# EAGLE board MIDICV (EAGLE 7.7.0)

Size 59.62 x 106.5 mm. Coordinates in mm from the lower left corner, seen from the top.
Copper layers (1*16): Top 0.035mm / dielectric 1.5mm / Bottom 0.035mm
Design rules "ITEADstudio_DRC": minimum track width 6mil, minimum drill 12mil, track to track 6mil, track to pad 6mil, pad to pad 6mil, via to via 6mil, smd to smd 0mil, copper to edge 10mil, drill to drill 10mil, minimum pad ring 10mil, minimum via ring 6mil, stop-mask expansion 2mil, vias tented up to drill 100mil, thermal gap 10mil
Net classes: 0 default: width 0.203 mm, clearance 0.178 mm; 1 heavypower: width 0.381 mm; 2 mediumpower: width 0.254 mm; 3 groundplane: width 0.178 mm, clearance 0.178 mm

## Footprints (pad centres in the part's own frame; a part is rotated, then mirrored left to right if it is on the bottom)
C0603 = smd 0.889 x 0.889: 1 -0.762,0; 2 0.762,0
AVX-A = smd 1.27 x 1.27: + -1.27,0; - 1.27,0
DO-214AC = smd 2.5 x 1.7: 1 -2,0; 2 2,0
SOT223 = smd 1.5 x 2: 1 -2.3,-3.15; 2 0,-3.15; 3 2.3,-3.15 | smd 3.8 x 2: 4 0,3.15
2X08_SMT_HEADER = smd 1 x 3.17: 1 -8.89,-2.54; 2 -8.89,2.54; 3 -6.35,-2.54; 4 -6.35,2.54; 5 -3.81,-2.54; 6 -3.81,2.54; 7 -1.27,-2.54; 8 -1.27,2.54; 9 1.27,-2.54; 10 1.27,2.54; 11 3.81,-2.54; 12 3.81,2.54; 13 6.35,-2.54; 14 6.35,2.54; 15 8.89,-2.54; 16 8.89,2.54
USB-B-PTH-VERTICAL = drill 0.914 pad 1.676: D+ 4.826,4.394; D- 4.826,7.595; GND 7.315,4.394; VBUS 7.315,7.595 | drill 2.286: P$1 0,4.902; P$2 12.04,4.902
3MMLED = drill 0.8: + -1.27,0; - 1.27,0
SOP65P640X110-16N = smd 1.422 x 0.356: 1 -2.845,2.286; 2 -2.845,1.626; 3 -2.845,0.965; 4 -2.845,0.33; 5 -2.845,-0.33; 6 -2.845,-0.965; 7 -2.845,-1.626; 8 -2.845,-2.286; 9 2.845,-2.286; 10 2.845,-1.626; 11 2.845,-0.965; 12 2.845,-0.33; 13 2.845,0.33; 14 2.845,0.965; 15 2.845,1.626; 16 2.845,2.286
SO14 = smd 0.6 x 2.2: 1 -3.81,-2.6; 2 -2.54,-2.6; 3 -1.27,-2.6; 4 0,-2.6; 5 1.27,-2.6; 6 2.54,-2.6; 7 3.81,-2.6; 8 3.81,2.6; 9 2.54,2.6; 10 1.27,2.6; 11 0,2.6; 12 -1.27,2.6; 13 -2.54,2.6; 14 -3.81,2.6
SOT23-BEC = smd 1 x 1.4: B -0.95,-1.1; C 0,1.1; E 0.95,-1.1
R0603 = smd 0.889 x 0.889: 1 -0.762,0; 2 0.762,0
3.5MM-JACK-SWITCH-13MM-OUTPUT = drill 0.8 pad 1.93 long: RING@3 -3.7,0; SECOND@3 0,-3.5; SWITCH@3 3.7,0; TIP@3 0,4.5
M50-3600542 = smd 0.75 x 2.5: 1 -2.54,-1.81; 2 -2.54,2; 3 -1.27,-1.81; 4 -1.27,2; 5 0,-1.81; 6 0,2; 7 1.27,-1.81; 8 1.27,2; 9 2.54,-1.81; 10 2.54,2
SOT95P237X112-3N = smd 1.321 x 0.559: 1 -1.016,0.94; 2 -1.016,-0.94; 3 1.016,0
QFN-32 = smd 1 x 0.3: 1 -2.625,1.75; 2 -2.625,1.25; 3 -2.625,0.75; 4 -2.625,0.25; 5 -2.625,-0.25; 6 -2.625,-0.75; 7 -2.625,-1.25; 8 -2.625,-1.75; 17 2.625,-1.75; 18 2.625,-1.25; 19 2.625,-0.75; 20 2.625,-0.25; 21 2.625,0.25; 22 2.625,0.75; 23 2.625,1.25; 24 2.625,1.75 | smd 0.3 x 1: 9 -1.75,-2.625; 10 -1.25,-2.625; 11 -0.75,-2.625; 12 -0.25,-2.625; 13 0.25,-2.625; 14 0.75,-2.625; 15 1.25,-2.625; 16 1.75,-2.625; 25 1.75,2.625; 26 1.25,2.625; 27 0.75,2.625; 28 0.25,2.625; 29 -0.25,2.625; 30 -0.75,2.625; 31 -1.25,2.625; 32 -1.75,2.625 | smd 3.5 x 3.5: GROUNDPAD 0,0
2P-SMD-5.0X3.2 = smd 1.778 x 2.032: 1 -2.159,0; 2 2.159,0

## Placement (x,y rotation side)
C1  [C0603]  101.4,28.26 0 top  (outside the outline)
C2  [C0603]  105.4,0.76 90 top  (outside the outline)
C3  [C0603]  110.9,0.26 0 top  (outside the outline)
C4  [C0603]  98.9,5.76 180 top  (outside the outline)
C6  [C0603]  92.57,2.33 90 top  (outside the outline)
C7  [C0603]  92.57,-0.77 90 top  (outside the outline)
C8  [C0603]  108.4,9.26 0 top  (outside the outline)
C9  100nF  [C0603]  -61.46,35.56 0 top  (outside the outline)
C10  10uF  [AVX-A]  -53.84,50.8 0 top  (outside the outline)
C11  100nF  [C0603]  -56.38,35.56 0 top  (outside the outline)
C12  10uF  [AVX-A]  -79.24,40.64 0 top  (outside the outline)
C13  10uF  [AVX-A]  -71.62,40.64 0 top  (outside the outline)
C14  100nF  [C0603]  -79.24,30.48 0 top  (outside the outline)
D1  MRA4004T3G  [DO-214AC]  -61.46,40.64 0 top  (outside the outline)
D2  MRA4004T3G  [DO-214AC]  -76.7,35.56 0 top  (outside the outline)
IC1  LD1117AS33TR  [SOT223]  -76.7,60.96 0 top  (outside the outline)
J14  POWERSMT  [2X08_SMT_HEADER]  -71.62,73.66 0 bottom  (outside the outline)
JP1  USBPTH-VERTICAL  [USB-B-PTH-VERTICAL]  17.28,15.24 180 top
OUTPUTCHANNEL1:C1  [C0603]  -58.92,119.38 0 top  (outside the outline)
OUTPUTCHANNEL1:C2  [C0603]  -69.08,99.06 0 top  (outside the outline)
OUTPUTCHANNEL1:C3  [C0603]  190,2.54 0 top  (outside the outline)
OUTPUTCHANNEL1:C4  [C0603]  136.66,-2.54 0 top  (outside the outline)
OUTPUTCHANNEL1:D40  yellow  [3MMLED]  70.62,38.1 0 top  (outside the outline)
OUTPUTCHANNEL1:IC1  DAC8564  [SOP65P640X110-16N]  -91.94,139.7 0 top  (outside the outline)
OUTPUTCHANNEL1:IC2  TL074D  [SO14]  -43.68,106.68 0 top  (outside the outline)
OUTPUTCHANNEL1:IC3  TL074D  [SO14]  176.54,92.71 0 top  (outside the outline)
OUTPUTCHANNEL1:Q3  MMBT3904  [SOT23-BEC]  -3.04,198.12 0 top  (outside the outline)
OUTPUTCHANNEL1:R1  100k  [R0603]  131.58,279.4 0 top  (outside the outline)
OUTPUTCHANNEL1:R2  100k  [R0603]  131.58,259.08 0 top  (outside the outline)
OUTPUTCHANNEL1:R3  100k  [R0603]  131.58,238.76 0 top  (outside the outline)
OUTPUTCHANNEL1:R4  100k  [R0603]  131.58,218.44 0 top  (outside the outline)
OUTPUTCHANNEL1:R5  100k  [R0603]  131.58,198.12 0 top  (outside the outline)
OUTPUTCHANNEL1:R6  100k  [R0603]  131.58,177.8 0 top  (outside the outline)
OUTPUTCHANNEL1:R7  100k  [R0603]  131.58,157.48 0 top  (outside the outline)
OUTPUTCHANNEL1:R8  100k  [R0603]  131.58,137.16 0 top  (outside the outline)
OUTPUTCHANNEL1:R9  100k  [R0603]  131.58,116.84 0 top  (outside the outline)
OUTPUTCHANNEL1:R10  56  [R0603]  12.2,177.8 0 top  (outside the outline)
OUTPUTCHANNEL1:R11  100k  [R0603]  131.58,96.52 0 top  (outside the outline)
OUTPUTCHANNEL1:R12  100k  [R0603]  184.92,76.2 0 top  (outside the outline)
OUTPUTCHANNEL1:R13  100k  [R0603]  165.87,85.09 0 top  (outside the outline)
OUTPUTCHANNEL1:R14  100k  [R0603]  183.65,85.09 0 top  (outside the outline)
OUTPUTCHANNEL1:R15  100k  [R0603]  201.43,85.09 0 top  (outside the outline)
OUTPUTCHANNEL1:R16  100k  [R0603]  219.21,85.09 0 top  (outside the outline)
OUTPUTCHANNEL1:R17  100k  [R0603]  165.87,80.01 0 top  (outside the outline)
OUTPUTCHANNEL1:R18  100k  [R0603]  183.65,80.01 0 top  (outside the outline)
OUTPUTCHANNEL1:R19  10k  [R0603]  -3.04,170.18 0 top  (outside the outline)
OUTPUTCHANNEL1:R20  100k  [R0603]  201.43,80.01 0 top  (outside the outline)
OUTPUTCHANNEL1:R21  100k  [R0603]  14.74,170.18 0 top  (outside the outline)
OUTPUTCHANNEL1:R22  100k  [R0603]  219.21,80.01 0 top  (outside the outline)
OUTPUTCHANNEL1:R23  100k  [R0603]  131.58,38.1 0 top  (outside the outline)
OUTPUTCHANNEL1:U$1  PJ-341  [3.5MM-JACK-SWITCH-13MM-OUTPUT]  70.62,58.42 0 top  (outside the outline)
OUTPUTCHANNEL1:U$2  PJ-341  [3.5MM-JACK-SWITCH-13MM-OUTPUT]  70.62,45.72 0 top  (outside the outline)
OUTPUTCHANNEL1:U$3  PJ-341  [3.5MM-JACK-SWITCH-13MM-OUTPUT]  70.62,71.12 0 top  (outside the outline)
OUTPUTCHANNEL1:U$4  PJ-341  [3.5MM-JACK-SWITCH-13MM-OUTPUT]  70.62,83.82 0 top  (outside the outline)
OUTPUTCHANNEL1:U$5  PJ-341  [3.5MM-JACK-SWITCH-13MM-OUTPUT]  70.62,96.52 0 top  (outside the outline)
OUTPUTCHANNEL2:C1  [C0603]  -61.46,114.3 0 top  (outside the outline)
OUTPUTCHANNEL2:C2  [C0603]  -71.62,93.98 0 top  (outside the outline)
OUTPUTCHANNEL2:C3  [C0603]  151.9,-2.54 0 top  (outside the outline)
OUTPUTCHANNEL2:C4  [C0603]  167.14,-2.54 0 top  (outside the outline)
OUTPUTCHANNEL2:D40  yellow  [3MMLED]  83.32,38.1 0 top  (outside the outline)
OUTPUTCHANNEL2:IC1  DAC8564  [SOP65P640X110-16N]  -94.48,175.26 0 top  (outside the outline)
OUTPUTCHANNEL2:IC2  TL074D  [SO14]  -53.84,154.94 0 top  (outside the outline)
OUTPUTCHANNEL2:IC3  TL074D  [SO14]  149.36,58.42 0 top  (outside the outline)
OUTPUTCHANNEL2:Q3  MMBT3904  [SOT23-BEC]  19.82,198.12 0 top  (outside the outline)
OUTPUTCHANNEL2:R1  100k  [R0603]  131.58,274.32 0 top  (outside the outline)
OUTPUTCHANNEL2:R2  100k  [R0603]  131.58,254 0 top  (outside the outline)
OUTPUTCHANNEL2:R3  100k  [R0603]  131.58,233.68 0 top  (outside the outline)
OUTPUTCHANNEL2:R4  100k  [R0603]  131.58,213.36 0 top  (outside the outline)
OUTPUTCHANNEL2:R5  100k  [R0603]  131.58,193.04 0 top  (outside the outline)
OUTPUTCHANNEL2:R6  100k  [R0603]  131.58,172.72 0 top  (outside the outline)
OUTPUTCHANNEL2:R7  100k  [R0603]  131.58,152.4 0 top  (outside the outline)
OUTPUTCHANNEL2:R8  100k  [R0603]  131.58,132.08 0 top  (outside the outline)
OUTPUTCHANNEL2:R9  100k  [R0603]  131.58,111.76 0 top  (outside the outline)
OUTPUTCHANNEL2:R10  56  [R0603]  -3.04,165.1 0 top  (outside the outline)
OUTPUTCHANNEL2:R11  100k  [R0603]  131.58,91.44 0 top  (outside the outline)
OUTPUTCHANNEL2:R12  100k  [R0603]  149.36,38.1 0 top  (outside the outline)
OUTPUTCHANNEL2:R13  100k  [R0603]  167.14,38.1 0 top  (outside the outline)
OUTPUTCHANNEL2:R14  100k  [R0603]  184.92,38.1 0 top  (outside the outline)
OUTPUTCHANNEL2:R15  100k  [R0603]  131.58,33.02 0 top  (outside the outline)
OUTPUTCHANNEL2:R16  100k  [R0603]  149.36,33.02 0 top  (outside the outline)
OUTPUTCHANNEL2:R17  100k  [R0603]  167.14,33.02 0 top  (outside the outline)
OUTPUTCHANNEL2:R18  100k  [R0603]  184.92,33.02 0 top  (outside the outline)
OUTPUTCHANNEL2:R19  10k  [R0603]  14.74,165.1 0 top  (outside the outline)
OUTPUTCHANNEL2:R20  100k  [R0603]  131.58,27.94 0 top  (outside the outline)
OUTPUTCHANNEL2:R21  100k  [R0603]  -3.04,160.02 0 top  (outside the outline)
OUTPUTCHANNEL2:R22  100k  [R0603]  149.36,27.94 0 top  (outside the outline)
OUTPUTCHANNEL2:R23  100k  [R0603]  167.14,27.94 0 top  (outside the outline)
OUTPUTCHANNEL2:U$1  PJ-341  [3.5MM-JACK-SWITCH-13MM-OUTPUT]  83.32,58.42 0 top  (outside the outline)
OUTPUTCHANNEL2:U$2  PJ-341  [3.5MM-JACK-SWITCH-13MM-OUTPUT]  83.32,45.72 0 top  (outside the outline)
OUTPUTCHANNEL2:U$3  PJ-341  [3.5MM-JACK-SWITCH-13MM-OUTPUT]  83.32,71.12 0 top  (outside the outline)
OUTPUTCHANNEL2:U$4  PJ-341  [3.5MM-JACK-SWITCH-13MM-OUTPUT]  83.32,83.82 0 top  (outside the outline)
OUTPUTCHANNEL2:U$5  PJ-341  [3.5MM-JACK-SWITCH-13MM-OUTPUT]  83.32,96.52 0 top  (outside the outline)
OUTPUTCHANNEL3:C1  [C0603]  -64,109.22 0 top  (outside the outline)
OUTPUTCHANNEL3:C2  [C0603]  -74.16,88.9 0 top  (outside the outline)
OUTPUTCHANNEL3:C3  [C0603]  182.38,-2.54 0 top  (outside the outline)
OUTPUTCHANNEL3:C4  [C0603]  136.66,-7.62 0 top  (outside the outline)
OUTPUTCHANNEL3:D40  yellow  [3MMLED]  96.02,38.1 0 top  (outside the outline)
OUTPUTCHANNEL3:IC1  DAC8564  [SOP65P640X110-16N]  -94.48,154.94 0 top  (outside the outline)
OUTPUTCHANNEL3:IC2  TL074D  [SO14]  -53.84,142.24 0 top  (outside the outline)
OUTPUTCHANNEL3:IC3  TL074D  [SO14]  162.06,58.42 0 top  (outside the outline)
OUTPUTCHANNEL3:Q3  MMBT3904  [SOT23-BEC]  -3.04,190.5 0 top  (outside the outline)
OUTPUTCHANNEL3:R1  100k  [R0603]  131.58,269.24 0 top  (outside the outline)
OUTPUTCHANNEL3:R2  100k  [R0603]  131.58,248.92 0 top  (outside the outline)
OUTPUTCHANNEL3:R3  100k  [R0603]  131.58,228.6 0 top  (outside the outline)
OUTPUTCHANNEL3:R4  100k  [R0603]  131.58,208.28 0 top  (outside the outline)
OUTPUTCHANNEL3:R5  100k  [R0603]  131.58,187.96 0 top  (outside the outline)
OUTPUTCHANNEL3:R6  100k  [R0603]  131.58,167.64 0 top  (outside the outline)
OUTPUTCHANNEL3:R7  100k  [R0603]  131.58,147.32 0 top  (outside the outline)
OUTPUTCHANNEL3:R8  100k  [R0603]  131.58,127 0 top  (outside the outline)
OUTPUTCHANNEL3:R9  100k  [R0603]  131.58,106.68 0 top  (outside the outline)
OUTPUTCHANNEL3:R10  56  [R0603]  14.74,160.02 0 top  (outside the outline)
OUTPUTCHANNEL3:R11  100k  [R0603]  131.58,86.36 0 top  (outside the outline)
OUTPUTCHANNEL3:R12  100k  [R0603]  184.92,27.94 0 top  (outside the outline)
OUTPUTCHANNEL3:R13  100k  [R0603]  131.58,22.86 0 top  (outside the outline)
OUTPUTCHANNEL3:R14  100k  [R0603]  149.36,22.86 0 top  (outside the outline)
OUTPUTCHANNEL3:R15  100k  [R0603]  167.14,22.86 0 top  (outside the outline)
OUTPUTCHANNEL3:R16  100k  [R0603]  184.92,22.86 0 top  (outside the outline)
OUTPUTCHANNEL3:R17  100k  [R0603]  131.58,17.78 0 top  (outside the outline)
OUTPUTCHANNEL3:R18  100k  [R0603]  149.36,17.78 0 top  (outside the outline)
OUTPUTCHANNEL3:R19  10k  [R0603]  -3.04,154.94 0 top  (outside the outline)
OUTPUTCHANNEL3:R20  100k  [R0603]  167.14,17.78 0 top  (outside the outline)
OUTPUTCHANNEL3:R21  100k  [R0603]  14.74,154.94 0 top  (outside the outline)
OUTPUTCHANNEL3:R22  100k  [R0603]  184.92,17.78 0 top  (outside the outline)
OUTPUTCHANNEL3:R23  100k  [R0603]  131.58,12.7 0 top  (outside the outline)
OUTPUTCHANNEL3:U$1  PJ-341  [3.5MM-JACK-SWITCH-13MM-OUTPUT]  96.02,58.42 0 top  (outside the outline)
OUTPUTCHANNEL3:U$2  PJ-341  [3.5MM-JACK-SWITCH-13MM-OUTPUT]  96.02,45.72 0 top  (outside the outline)
OUTPUTCHANNEL3:U$3  PJ-341  [3.5MM-JACK-SWITCH-13MM-OUTPUT]  96.02,71.12 0 top  (outside the outline)
OUTPUTCHANNEL3:U$4  PJ-341  [3.5MM-JACK-SWITCH-13MM-OUTPUT]  96.02,83.82 0 top  (outside the outline)
OUTPUTCHANNEL3:U$5  PJ-341  [3.5MM-JACK-SWITCH-13MM-OUTPUT]  96.02,96.52 0 top  (outside the outline)
OUTPUTCHANNEL4:C1  [C0603]  -66.54,104.14 0 top  (outside the outline)
OUTPUTCHANNEL4:C2  [C0603]  -76.7,83.82 0 top  (outside the outline)
OUTPUTCHANNEL4:C3  [C0603]  151.9,-7.62 0 top  (outside the outline)
OUTPUTCHANNEL4:C4  [C0603]  167.14,-7.62 0 top  (outside the outline)
OUTPUTCHANNEL4:D40  yellow  [3MMLED]  108.72,38.1 0 top  (outside the outline)
OUTPUTCHANNEL4:IC1  DAC8564  [SOP65P640X110-16N]  -86.86,127 0 top  (outside the outline)
OUTPUTCHANNEL4:IC2  TL074D  [SO14]  -53.84,129.54 0 top  (outside the outline)
OUTPUTCHANNEL4:IC3  TL074D  [SO14]  174.76,58.42 0 top  (outside the outline)
OUTPUTCHANNEL4:Q3  MMBT3904  [SOT23-BEC]  19.82,190.5 0 top  (outside the outline)
OUTPUTCHANNEL4:R1  100k  [R0603]  131.58,264.16 0 top  (outside the outline)
OUTPUTCHANNEL4:R2  100k  [R0603]  131.58,243.84 0 top  (outside the outline)
OUTPUTCHANNEL4:R3  100k  [R0603]  131.58,223.52 0 top  (outside the outline)
OUTPUTCHANNEL4:R4  100k  [R0603]  131.58,203.2 0 top  (outside the outline)
OUTPUTCHANNEL4:R5  100k  [R0603]  131.58,182.88 0 top  (outside the outline)
OUTPUTCHANNEL4:R6  100k  [R0603]  131.58,162.56 0 top  (outside the outline)
OUTPUTCHANNEL4:R7  100k  [R0603]  131.58,142.24 0 top  (outside the outline)
OUTPUTCHANNEL4:R8  100k  [R0603]  131.58,121.92 0 top  (outside the outline)
OUTPUTCHANNEL4:R9  100k  [R0603]  131.58,101.6 0 top  (outside the outline)
OUTPUTCHANNEL4:R10  56  [R0603]  -3.04,149.86 0 top  (outside the outline)
OUTPUTCHANNEL4:R11  100k  [R0603]  131.58,81.28 0 top  (outside the outline)
OUTPUTCHANNEL4:R12  100k  [R0603]  149.36,12.7 0 top  (outside the outline)
OUTPUTCHANNEL4:R13  100k  [R0603]  167.14,12.7 0 top  (outside the outline)
OUTPUTCHANNEL4:R14  100k  [R0603]  184.92,12.7 0 top  (outside the outline)
OUTPUTCHANNEL4:R15  100k  [R0603]  131.58,7.62 0 top  (outside the outline)
OUTPUTCHANNEL4:R16  100k  [R0603]  149.36,7.62 0 top  (outside the outline)
OUTPUTCHANNEL4:R17  100k  [R0603]  167.14,7.62 0 top  (outside the outline)
OUTPUTCHANNEL4:R18  100k  [R0603]  184.92,7.62 0 top  (outside the outline)
OUTPUTCHANNEL4:R19  10k  [R0603]  14.74,149.86 0 top  (outside the outline)
OUTPUTCHANNEL4:R20  100k  [R0603]  131.58,2.54 0 top  (outside the outline)
OUTPUTCHANNEL4:R21  100k  [R0603]  -3.04,144.78 0 top  (outside the outline)
OUTPUTCHANNEL4:R22  100k  [R0603]  149.36,2.54 0 top  (outside the outline)
OUTPUTCHANNEL4:R23  100k  [R0603]  167.14,2.54 0 top  (outside the outline)
OUTPUTCHANNEL4:U$1  PJ-341  [3.5MM-JACK-SWITCH-13MM-OUTPUT]  108.72,58.42 0 top  (outside the outline)
OUTPUTCHANNEL4:U$2  PJ-341  [3.5MM-JACK-SWITCH-13MM-OUTPUT]  108.72,45.72 0 top  (outside the outline)
OUTPUTCHANNEL4:U$3  PJ-341  [3.5MM-JACK-SWITCH-13MM-OUTPUT]  108.72,71.12 0 top  (outside the outline)
OUTPUTCHANNEL4:U$4  PJ-341  [3.5MM-JACK-SWITCH-13MM-OUTPUT]  108.72,83.82 0 top  (outside the outline)
OUTPUTCHANNEL4:U$5  PJ-341  [3.5MM-JACK-SWITCH-13MM-OUTPUT]  108.72,96.52 0 top  (outside the outline)
R1  33  [R0603]  108.9,-1.74 270 top  (outside the outline)
R2  33  [R0603]  107.4,-1.74 270 top  (outside the outline)
R26  10k  [R0603]  -66.54,35.56 0 top  (outside the outline)
SWD1  CORTEX_SWD  [M50-3600542]  85.66,11.22 270 bottom  (outside the outline)
U2  LM4040DIM3-5.0  [SOT95P237X112-3N]  -76.7,48.26 0 top  (outside the outline)
U$1  KL26X32VFM4  [QFN-32]  100.9,-1.74 180 top  (outside the outline)
U$2  EURORACK_PCB12HP  [EURORACK12HPPCB]  -0.5,0 0 top
X2  CRYSTAL-0500290P1  [2P-SMD-5.0X3.2]  94.98,0.66 90 top  (outside the outline)

## Library data of the parts
C1-C4 C6-C8 OUTPUTCHANNEL1:C1-OUTPUTCHANNEL1:C4 OUTPUTCHANNEL2:C1-OUTPUTCHANNEL2:C4 OUTPUTCHANNEL3:C1-OUTPUTCHANNEL3:C4 OUTPUTCHANNEL4:C1-OUTPUTCHANNEL4:C4 R1 R2 X2 = OPL
C9 C11 = OPL; MF: MULTICOMP; MPN: MC0603F104Z160CT; OC_FARNELL: 1759017
C10 C12 C13 = OPL; MF: AVX; MPN: TAJB106K020RNJ; OC_FARNELL: 197427
C14 = OPL; MF: AVX; MPN: 06035C104KAT2A; OC_FARNELL: 1301804
D1 D2 = OPL; MF: VISHAY; MPN: US1G-E3/5AT; OC_FARNELL: 9551824
IC1 = ld-components; MF: STMICROELECTRONICS; MPN: LD1117AS33TR; OC_FARNELL: 1467776
J14 = EurorackModularParts; OC_FARNELL: unknown
JP1 = SparkFun-Connectors
OUTPUTCHANNEL1:D40 OUTPUTCHANNEL1:IC1-OUTPUTCHANNEL1:IC3 OUTPUTCHANNEL2:D40 OUTPUTCHANNEL2:IC1-OUTPUTCHANNEL2:IC3 OUTPUTCHANNEL3:D40 OUTPUTCHANNEL3:IC1-OUTPUTCHANNEL3:IC3 OUTPUTCHANNEL4:D40 OUTPUTCHANNEL4:IC1-OUTPUTCHANNEL4:IC3 U$2 = EurorackModularParts
OUTPUTCHANNEL1:Q3 OUTPUTCHANNEL2:Q3 OUTPUTCHANNEL3:Q3 OUTPUTCHANNEL4:Q3 = transistor; MF: NXP; MPN: PMBT3904,215; OC_FARNELL: 2336795
OUTPUTCHANNEL1:R1-OUTPUTCHANNEL1:R23 OUTPUTCHANNEL2:R1-OUTPUTCHANNEL2:R23 OUTPUTCHANNEL3:R1-OUTPUTCHANNEL3:R23 OUTPUTCHANNEL4:R1-OUTPUTCHANNEL4:R23 R26 = OPL; OC_FARNELL: unknown
OUTPUTCHANNEL1:U$1 OUTPUTCHANNEL2:U$1 OUTPUTCHANNEL3:U$1 OUTPUTCHANNEL4:U$1 = EurorackModularParts; DESC: CV; MPN: PJ-341
OUTPUTCHANNEL1:U$2 OUTPUTCHANNEL2:U$2 OUTPUTCHANNEL3:U$2 OUTPUTCHANNEL4:U$2 = EurorackModularParts; DESC: GATE; MPN: PJ-341
OUTPUTCHANNEL1:U$3 OUTPUTCHANNEL2:U$3 OUTPUTCHANNEL3:U$3 OUTPUTCHANNEL4:U$3 = EurorackModularParts; DESC: VELOCITY; MPN: PJ-341
OUTPUTCHANNEL1:U$4 OUTPUTCHANNEL2:U$4 OUTPUTCHANNEL3:U$4 OUTPUTCHANNEL4:U$4 = EurorackModularParts; DESC: MOD; MPN: PJ-341
OUTPUTCHANNEL1:U$5 OUTPUTCHANNEL2:U$5 OUTPUTCHANNEL3:U$5 OUTPUTCHANNEL4:U$5 = EurorackModularParts; DESC: PITCH; MPN: PJ-341
SWD1 = carrilib with jtags
U2 = FarnellThings; MF: TEXAS INSTRUMENTS; MPN: LM4040DIM3-5.0; OC_FARNELL: 9778330; OC_NEWARK: 97K3489; PACKAGE: SOT-23-3; SUPPLIER: TEXAS INSTRUMENTS
U$1 = MK26-QFN

## Nets
3.3V: C1.1 C2.1 C3.1 C4.1 C8.1 C9.2 C12.+ IC1.2 IC1.4 SWD1.1 U$1.7 U$1.15
12V [heavypower]: C11.2 C13.+ D1.2 IC1.3 OUTPUTCHANNEL1:C1.1 OUTPUTCHANNEL1:C3.1 OUTPUTCHANNEL1:IC2.4 OUTPUTCHANNEL1:IC3.4 OUTPUTCHANNEL1:R19.2 OUTPUTCHANNEL2:C1.1 OUTPUTCHANNEL2:C3.1 OUTPUTCHANNEL2:IC2.4 OUTPUTCHANNEL2:IC3.4 OUTPUTCHANNEL2:R19.2 OUTPUTCHANNEL3:C1.1 OUTPUTCHANNEL3:C3.1 OUTPUTCHANNEL3:IC2.4 OUTPUTCHANNEL3:IC3.4 OUTPUTCHANNEL3:R19.2 OUTPUTCHANNEL4:C1.1 OUTPUTCHANNEL4:C3.1 OUTPUTCHANNEL4:IC2.4 OUTPUTCHANNEL4:IC3.4 OUTPUTCHANNEL4:R19.2
-12V [heavypower]: C10.- D2.1 OUTPUTCHANNEL1:C2.1 OUTPUTCHANNEL1:C4.1 OUTPUTCHANNEL1:IC2.11 OUTPUTCHANNEL1:IC3.11 OUTPUTCHANNEL2:C2.1 OUTPUTCHANNEL2:C4.1 OUTPUTCHANNEL2:IC2.11 OUTPUTCHANNEL2:IC3.11 OUTPUTCHANNEL3:C2.1 OUTPUTCHANNEL3:C4.1 OUTPUTCHANNEL3:IC2.11 OUTPUTCHANNEL3:IC3.11 OUTPUTCHANNEL4:C2.1 OUTPUTCHANNEL4:C4.1 OUTPUTCHANNEL4:IC2.11 OUTPUTCHANNEL4:IC3.11 R26.1
BUTTON4: SWD1.10 U$1.19
EXTCV: J14.13 J14.14 OUTPUTCHANNEL1:R2.2 OUTPUTCHANNEL1:U$1.TIP@3
EXTGATE: J14.15 J14.16 OUTPUTCHANNEL1:R10.2 OUTPUTCHANNEL1:R21.1
GND: C1.2 C2.2 C3.2 C4.2 C6.1 C7.2 C8.2 C9.1 C10.+ C11.1 C12.- C13.- C14.1 IC1.1 J14.3 J14.4 J14.5 J14.6 J14.7 J14.8 JP1.GND OUTPUTCHANNEL1:C1.2 OUTPUTCHANNEL1:C2.2 OUTPUTCHANNEL1:C3.2 OUTPUTCHANNEL1:C4.2 OUTPUTCHANNEL1:IC1.6 OUTPUTCHANNEL1:IC2.3 OUTPUTCHANNEL1:IC2.5 OUTPUTCHANNEL1:IC2.10 OUTPUTCHANNEL1:IC2.12 OUTPUTCHANNEL1:IC3.3 OUTPUTCHANNEL1:IC3.5 OUTPUTCHANNEL1:IC3.10 OUTPUTCHANNEL1:IC3.12 OUTPUTCHANNEL1:Q3.E OUTPUTCHANNEL1:U$1.RING@3 OUTPUTCHANNEL1:U$2.RING@3 OUTPUTCHANNEL1:U$3.RING@3 OUTPUTCHANNEL1:U$4.RING@3 OUTPUTCHANNEL1:U$5.RING@3 OUTPUTCHANNEL2:C1.2 OUTPUTCHANNEL2:C2.2 OUTPUTCHANNEL2:C3.2 OUTPUTCHANNEL2:C4.2 OUTPUTCHANNEL2:IC1.6 OUTPUTCHANNEL2:IC2.3 OUTPUTCHANNEL2:IC2.5 OUTPUTCHANNEL2:IC2.10 OUTPUTCHANNEL2:IC2.12 OUTPUTCHANNEL2:IC3.3 OUTPUTCHANNEL2:IC3.5 OUTPUTCHANNEL2:IC3.10 OUTPUTCHANNEL2:IC3.12 OUTPUTCHANNEL2:Q3.E OUTPUTCHANNEL2:U$1.RING@3 OUTPUTCHANNEL2:U$2.RING@3 OUTPUTCHANNEL2:U$3.RING@3 OUTPUTCHANNEL2:U$4.RING@3 OUTPUTCHANNEL2:U$5.RING@3 OUTPUTCHANNEL3:C1.2 OUTPUTCHANNEL3:C2.2 OUTPUTCHANNEL3:C3.2 OUTPUTCHANNEL3:C4.2 OUTPUTCHANNEL3:IC1.6 OUTPUTCHANNEL3:IC2.3 OUTPUTCHANNEL3:IC2.5 OUTPUTCHANNEL3:IC2.10 OUTPUTCHANNEL3:IC2.12 OUTPUTCHANNEL3:IC3.3 OUTPUTCHANNEL3:IC3.5 OUTPUTCHANNEL3:IC3.10 OUTPUTCHANNEL3:IC3.12 OUTPUTCHANNEL3:Q3.E OUTPUTCHANNEL3:U$1.RING@3 OUTPUTCHANNEL3:U$2.RING@3 OUTPUTCHANNEL3:U$3.RING@3 OUTPUTCHANNEL3:U$4.RING@3 OUTPUTCHANNEL3:U$5.RING@3 OUTPUTCHANNEL4:C1.2 OUTPUTCHANNEL4:C2.2 OUTPUTCHANNEL4:C3.2 OUTPUTCHANNEL4:C4.2 OUTPUTCHANNEL4:IC1.6 OUTPUTCHANNEL4:IC2.3 OUTPUTCHANNEL4:IC2.5 OUTPUTCHANNEL4:IC2.10 OUTPUTCHANNEL4:IC2.12 OUTPUTCHANNEL4:IC3.3 OUTPUTCHANNEL4:IC3.5 OUTPUTCHANNEL4:IC3.10 OUTPUTCHANNEL4:IC3.12 OUTPUTCHANNEL4:Q3.E OUTPUTCHANNEL4:U$1.RING@3 OUTPUTCHANNEL4:U$2.RING@3 OUTPUTCHANNEL4:U$3.RING@3 OUTPUTCHANNEL4:U$4.RING@3 OUTPUTCHANNEL4:U$5.RING@3 SWD1.3 SWD1.5 SWD1.9 U2.1 U$1.2 U$1.8 U$1.16 U$1.GROUNDPAD
N$1: JP1.D- R2.1
N$2: JP1.D+ R1.1
N$3: R1.2 U$1.3
N$4: R2.2 U$1.4
N$5: OUTPUTCHANNEL2:R10.2 OUTPUTCHANNEL2:R21.1
N$6: OUTPUTCHANNEL3:R10.2 OUTPUTCHANNEL3:R21.1
N$7: OUTPUTCHANNEL4:R10.2 OUTPUTCHANNEL4:R21.1
N$11: C6.2 U$1.17 X2.2
N$12: C7.1 U$1.18 X2.1
N$13 [heavypower]: D1.1 J14.9 J14.10
N$64 [heavypower]: D2.2 J14.1 J14.2
OUTPUTCHANNEL1:3.3V [mediumpower]: OUTPUTCHANNEL1:D40.+
OUTPUTCHANNEL1:MOD: OUTPUTCHANNEL1:R13.2 OUTPUTCHANNEL1:U$4.TIP@3
OUTPUTCHANNEL1:N$1: OUTPUTCHANNEL1:IC1.15
OUTPUTCHANNEL1:N$2: OUTPUTCHANNEL1:IC1.11
OUTPUTCHANNEL1:N$3: OUTPUTCHANNEL1:IC1.10
OUTPUTCHANNEL1:N$4: OUTPUTCHANNEL1:IC1.9
OUTPUTCHANNEL1:N$5: OUTPUTCHANNEL1:IC2.6 OUTPUTCHANNEL1:R1.2 OUTPUTCHANNEL1:R9.1
OUTPUTCHANNEL1:N$6: OUTPUTCHANNEL1:IC2.13 OUTPUTCHANNEL1:R4.2 OUTPUTCHANNEL1:R8.1
OUTPUTCHANNEL1:N$8: OUTPUTCHANNEL1:IC2.14 OUTPUTCHANNEL1:R3.1 OUTPUTCHANNEL1:R8.2
OUTPUTCHANNEL1:N$9: OUTPUTCHANNEL1:IC2.7 OUTPUTCHANNEL1:R2.1 OUTPUTCHANNEL1:R9.2
OUTPUTCHANNEL1:N$11: OUTPUTCHANNEL1:IC2.1 OUTPUTCHANNEL1:R1.1 OUTPUTCHANNEL1:R11.2
OUTPUTCHANNEL1:N$12: OUTPUTCHANNEL1:IC2.8 OUTPUTCHANNEL1:R4.1 OUTPUTCHANNEL1:R7.2
OUTPUTCHANNEL1:N$13: OUTPUTCHANNEL1:IC2.2 OUTPUTCHANNEL1:R5.2 OUTPUTCHANNEL1:R11.1
OUTPUTCHANNEL1:N$14: OUTPUTCHANNEL1:IC2.9 OUTPUTCHANNEL1:R6.2 OUTPUTCHANNEL1:R7.1
OUTPUTCHANNEL1:N$15: OUTPUTCHANNEL1:IC1.2 OUTPUTCHANNEL1:R6.1
OUTPUTCHANNEL1:N$16: OUTPUTCHANNEL1:IC1.1 OUTPUTCHANNEL1:R5.1
OUTPUTCHANNEL1:N$17: OUTPUTCHANNEL1:IC3.6 OUTPUTCHANNEL1:R12.2 OUTPUTCHANNEL1:R22.1
OUTPUTCHANNEL1:N$18: OUTPUTCHANNEL1:IC3.13 OUTPUTCHANNEL1:R15.2 OUTPUTCHANNEL1:R20.1
OUTPUTCHANNEL1:N$20: OUTPUTCHANNEL1:IC3.14 OUTPUTCHANNEL1:R14.1 OUTPUTCHANNEL1:R20.2
OUTPUTCHANNEL1:N$21: OUTPUTCHANNEL1:IC3.7 OUTPUTCHANNEL1:R13.1 OUTPUTCHANNEL1:R22.2
OUTPUTCHANNEL1:N$23: OUTPUTCHANNEL1:D40.- OUTPUTCHANNEL1:R10.1
OUTPUTCHANNEL1:N$24: OUTPUTCHANNEL1:IC3.1 OUTPUTCHANNEL1:R12.1 OUTPUTCHANNEL1:R23.2
OUTPUTCHANNEL1:N$25: OUTPUTCHANNEL1:Q3.B OUTPUTCHANNEL1:R21.2
OUTPUTCHANNEL1:N$26: OUTPUTCHANNEL1:IC3.8 OUTPUTCHANNEL1:R15.1 OUTPUTCHANNEL1:R18.2
OUTPUTCHANNEL1:N$27: OUTPUTCHANNEL1:IC3.2 OUTPUTCHANNEL1:R16.2 OUTPUTCHANNEL1:R23.1
OUTPUTCHANNEL1:N$28: OUTPUTCHANNEL1:IC3.9 OUTPUTCHANNEL1:R17.2 OUTPUTCHANNEL1:R18.1
OUTPUTCHANNEL1:N$29: OUTPUTCHANNEL1:Q3.C OUTPUTCHANNEL1:R19.1 OUTPUTCHANNEL1:U$2.TIP@3
OUTPUTCHANNEL1:N$30: OUTPUTCHANNEL1:IC1.8 OUTPUTCHANNEL1:R17.1
OUTPUTCHANNEL1:N$31: OUTPUTCHANNEL1:IC1.7 OUTPUTCHANNEL1:R16.1
OUTPUTCHANNEL1:N$35: OUTPUTCHANNEL1:IC1.13
OUTPUTCHANNEL1:N$36: OUTPUTCHANNEL1:IC1.14
OUTPUTCHANNEL1:N$37: OUTPUTCHANNEL1:IC1.16
OUTPUTCHANNEL1:N$38: OUTPUTCHANNEL1:IC1.12
OUTPUTCHANNEL1:N$39: OUTPUTCHANNEL1:IC1.3
OUTPUTCHANNEL1:N$40: OUTPUTCHANNEL1:IC1.5
OUTPUTCHANNEL1:N$41: OUTPUTCHANNEL1:IC1.4
OUTPUTCHANNEL1:PITCH: OUTPUTCHANNEL1:R14.2 OUTPUTCHANNEL1:U$5.TIP@3
OUTPUTCHANNEL1:VELOCITY: OUTPUTCHANNEL1:R3.2 OUTPUTCHANNEL1:U$3.TIP@3
OUTPUTCHANNEL2:3.3V [mediumpower]: OUTPUTCHANNEL2:D40.+
OUTPUTCHANNEL2:CV_OUT: OUTPUTCHANNEL2:R2.2 OUTPUTCHANNEL2:U$1.TIP@3
OUTPUTCHANNEL2:MOD: OUTPUTCHANNEL2:R13.2 OUTPUTCHANNEL2:U$4.TIP@3
OUTPUTCHANNEL2:N$1: OUTPUTCHANNEL2:IC1.15
OUTPUTCHANNEL2:N$2: OUTPUTCHANNEL2:IC1.11
OUTPUTCHANNEL2:N$3: OUTPUTCHANNEL2:IC1.10
OUTPUTCHANNEL2:N$4: OUTPUTCHANNEL2:IC1.9
OUTPUTCHANNEL2:N$5: OUTPUTCHANNEL2:IC2.6 OUTPUTCHANNEL2:R1.2 OUTPUTCHANNEL2:R9.1
OUTPUTCHANNEL2:N$6: OUTPUTCHANNEL2:IC2.13 OUTPUTCHANNEL2:R4.2 OUTPUTCHANNEL2:R8.1
OUTPUTCHANNEL2:N$8: OUTPUTCHANNEL2:IC2.14 OUTPUTCHANNEL2:R3.1 OUTPUTCHANNEL2:R8.2
OUTPUTCHANNEL2:N$9: OUTPUTCHANNEL2:IC2.7 OUTPUTCHANNEL2:R2.1 OUTPUTCHANNEL2:R9.2
OUTPUTCHANNEL2:N$11: OUTPUTCHANNEL2:IC2.1 OUTPUTCHANNEL2:R1.1 OUTPUTCHANNEL2:R11.2
OUTPUTCHANNEL2:N$12: OUTPUTCHANNEL2:IC2.8 OUTPUTCHANNEL2:R4.1 OUTPUTCHANNEL2:R7.2
OUTPUTCHANNEL2:N$13: OUTPUTCHANNEL2:IC2.2 OUTPUTCHANNEL2:R5.2 OUTPUTCHANNEL2:R11.1
OUTPUTCHANNEL2:N$14: OUTPUTCHANNEL2:IC2.9 OUTPUTCHANNEL2:R6.2 OUTPUTCHANNEL2:R7.1
OUTPUTCHANNEL2:N$15: OUTPUTCHANNEL2:IC1.2 OUTPUTCHANNEL2:R6.1
OUTPUTCHANNEL2:N$16: OUTPUTCHANNEL2:IC1.1 OUTPUTCHANNEL2:R5.1
OUTPUTCHANNEL2:N$17: OUTPUTCHANNEL2:IC3.6 OUTPUTCHANNEL2:R12.2 OUTPUTCHANNEL2:R22.1
OUTPUTCHANNEL2:N$18: OUTPUTCHANNEL2:IC3.13 OUTPUTCHANNEL2:R15.2 OUTPUTCHANNEL2:R20.1
OUTPUTCHANNEL2:N$20: OUTPUTCHANNEL2:IC3.14 OUTPUTCHANNEL2:R14.1 OUTPUTCHANNEL2:R20.2
OUTPUTCHANNEL2:N$21: OUTPUTCHANNEL2:IC3.7 OUTPUTCHANNEL2:R13.1 OUTPUTCHANNEL2:R22.2
OUTPUTCHANNEL2:N$23: OUTPUTCHANNEL2:D40.- OUTPUTCHANNEL2:R10.1
OUTPUTCHANNEL2:N$24: OUTPUTCHANNEL2:IC3.1 OUTPUTCHANNEL2:R12.1 OUTPUTCHANNEL2:R23.2
OUTPUTCHANNEL2:N$25: OUTPUTCHANNEL2:Q3.B OUTPUTCHANNEL2:R21.2
OUTPUTCHANNEL2:N$26: OUTPUTCHANNEL2:IC3.8 OUTPUTCHANNEL2:R15.1 OUTPUTCHANNEL2:R18.2
OUTPUTCHANNEL2:N$27: OUTPUTCHANNEL2:IC3.2 OUTPUTCHANNEL2:R16.2 OUTPUTCHANNEL2:R23.1
OUTPUTCHANNEL2:N$28: OUTPUTCHANNEL2:IC3.9 OUTPUTCHANNEL2:R17.2 OUTPUTCHANNEL2:R18.1
OUTPUTCHANNEL2:N$29: OUTPUTCHANNEL2:Q3.C OUTPUTCHANNEL2:R19.1 OUTPUTCHANNEL2:U$2.TIP@3
OUTPUTCHANNEL2:N$30: OUTPUTCHANNEL2:IC1.8 OUTPUTCHANNEL2:R17.1
OUTPUTCHANNEL2:N$31: OUTPUTCHANNEL2:IC1.7 OUTPUTCHANNEL2:R16.1
OUTPUTCHANNEL2:N$35: OUTPUTCHANNEL2:IC1.13
OUTPUTCHANNEL2:N$36: OUTPUTCHANNEL2:IC1.14
OUTPUTCHANNEL2:N$37: OUTPUTCHANNEL2:IC1.16
OUTPUTCHANNEL2:N$38: OUTPUTCHANNEL2:IC1.12
OUTPUTCHANNEL2:N$39: OUTPUTCHANNEL2:IC1.3
OUTPUTCHANNEL2:N$40: OUTPUTCHANNEL2:IC1.5
OUTPUTCHANNEL2:N$41: OUTPUTCHANNEL2:IC1.4
OUTPUTCHANNEL2:PITCH: OUTPUTCHANNEL2:R14.2 OUTPUTCHANNEL2:U$5.TIP@3
OUTPUTCHANNEL2:VELOCITY: OUTPUTCHANNEL2:R3.2 OUTPUTCHANNEL2:U$3.TIP@3
OUTPUTCHANNEL3:3.3V [mediumpower]: OUTPUTCHANNEL3:D40.+
OUTPUTCHANNEL3:CV_OUT: OUTPUTCHANNEL3:R2.2 OUTPUTCHANNEL3:U$1.TIP@3
OUTPUTCHANNEL3:MOD: OUTPUTCHANNEL3:R13.2 OUTPUTCHANNEL3:U$4.TIP@3
OUTPUTCHANNEL3:N$1: OUTPUTCHANNEL3:IC1.15
OUTPUTCHANNEL3:N$2: OUTPUTCHANNEL3:IC1.11
OUTPUTCHANNEL3:N$3: OUTPUTCHANNEL3:IC1.10
OUTPUTCHANNEL3:N$4: OUTPUTCHANNEL3:IC1.9
OUTPUTCHANNEL3:N$5: OUTPUTCHANNEL3:IC2.6 OUTPUTCHANNEL3:R1.2 OUTPUTCHANNEL3:R9.1
OUTPUTCHANNEL3:N$6: OUTPUTCHANNEL3:IC2.13 OUTPUTCHANNEL3:R4.2 OUTPUTCHANNEL3:R8.1
OUTPUTCHANNEL3:N$8: OUTPUTCHANNEL3:IC2.14 OUTPUTCHANNEL3:R3.1 OUTPUTCHANNEL3:R8.2
OUTPUTCHANNEL3:N$9: OUTPUTCHANNEL3:IC2.7 OUTPUTCHANNEL3:R2.1 OUTPUTCHANNEL3:R9.2
OUTPUTCHANNEL3:N$11: OUTPUTCHANNEL3:IC2.1 OUTPUTCHANNEL3:R1.1 OUTPUTCHANNEL3:R11.2
OUTPUTCHANNEL3:N$12: OUTPUTCHANNEL3:IC2.8 OUTPUTCHANNEL3:R4.1 OUTPUTCHANNEL3:R7.2
OUTPUTCHANNEL3:N$13: OUTPUTCHANNEL3:IC2.2 OUTPUTCHANNEL3:R5.2 OUTPUTCHANNEL3:R11.1
OUTPUTCHANNEL3:N$14: OUTPUTCHANNEL3:IC2.9 OUTPUTCHANNEL3:R6.2 OUTPUTCHANNEL3:R7.1
OUTPUTCHANNEL3:N$15: OUTPUTCHANNEL3:IC1.2 OUTPUTCHANNEL3:R6.1
OUTPUTCHANNEL3:N$16: OUTPUTCHANNEL3:IC1.1 OUTPUTCHANNEL3:R5.1
OUTPUTCHANNEL3:N$17: OUTPUTCHANNEL3:IC3.6 OUTPUTCHANNEL3:R12.2 OUTPUTCHANNEL3:R22.1
OUTPUTCHANNEL3:N$18: OUTPUTCHANNEL3:IC3.13 OUTPUTCHANNEL3:R15.2 OUTPUTCHANNEL3:R20.1
OUTPUTCHANNEL3:N$20: OUTPUTCHANNEL3:IC3.14 OUTPUTCHANNEL3:R14.1 OUTPUTCHANNEL3:R20.2
OUTPUTCHANNEL3:N$21: OUTPUTCHANNEL3:IC3.7 OUTPUTCHANNEL3:R13.1 OUTPUTCHANNEL3:R22.2
OUTPUTCHANNEL3:N$23: OUTPUTCHANNEL3:D40.- OUTPUTCHANNEL3:R10.1
OUTPUTCHANNEL3:N$24: OUTPUTCHANNEL3:IC3.1 OUTPUTCHANNEL3:R12.1 OUTPUTCHANNEL3:R23.2
OUTPUTCHANNEL3:N$25: OUTPUTCHANNEL3:Q3.B OUTPUTCHANNEL3:R21.2
OUTPUTCHANNEL3:N$26: OUTPUTCHANNEL3:IC3.8 OUTPUTCHANNEL3:R15.1 OUTPUTCHANNEL3:R18.2
OUTPUTCHANNEL3:N$27: OUTPUTCHANNEL3:IC3.2 OUTPUTCHANNEL3:R16.2 OUTPUTCHANNEL3:R23.1
OUTPUTCHANNEL3:N$28: OUTPUTCHANNEL3:IC3.9 OUTPUTCHANNEL3:R17.2 OUTPUTCHANNEL3:R18.1
OUTPUTCHANNEL3:N$29: OUTPUTCHANNEL3:Q3.C OUTPUTCHANNEL3:R19.1 OUTPUTCHANNEL3:U$2.TIP@3
OUTPUTCHANNEL3:N$30: OUTPUTCHANNEL3:IC1.8 OUTPUTCHANNEL3:R17.1
OUTPUTCHANNEL3:N$31: OUTPUTCHANNEL3:IC1.7 OUTPUTCHANNEL3:R16.1
OUTPUTCHANNEL3:N$35: OUTPUTCHANNEL3:IC1.13
OUTPUTCHANNEL3:N$36: OUTPUTCHANNEL3:IC1.14
OUTPUTCHANNEL3:N$37: OUTPUTCHANNEL3:IC1.16
OUTPUTCHANNEL3:N$38: OUTPUTCHANNEL3:IC1.12
OUTPUTCHANNEL3:N$39: OUTPUTCHANNEL3:IC1.3
OUTPUTCHANNEL3:N$40: OUTPUTCHANNEL3:IC1.5
OUTPUTCHANNEL3:N$41: OUTPUTCHANNEL3:IC1.4
OUTPUTCHANNEL3:PITCH: OUTPUTCHANNEL3:R14.2 OUTPUTCHANNEL3:U$5.TIP@3
OUTPUTCHANNEL3:VELOCITY: OUTPUTCHANNEL3:R3.2 OUTPUTCHANNEL3:U$3.TIP@3
OUTPUTCHANNEL4:3.3V [mediumpower]: OUTPUTCHANNEL4:D40.+
OUTPUTCHANNEL4:CV_OUT: OUTPUTCHANNEL4:R2.2 OUTPUTCHANNEL4:U$1.TIP@3
OUTPUTCHANNEL4:MOD: OUTPUTCHANNEL4:R13.2 OUTPUTCHANNEL4:U$4.TIP@3
OUTPUTCHANNEL4:N$1: OUTPUTCHANNEL4:IC1.15
OUTPUTCHANNEL4:N$2: OUTPUTCHANNEL4:IC1.11
OUTPUTCHANNEL4:N$3: OUTPUTCHANNEL4:IC1.10
OUTPUTCHANNEL4:N$4: OUTPUTCHANNEL4:IC1.9
OUTPUTCHANNEL4:N$5: OUTPUTCHANNEL4:IC2.6 OUTPUTCHANNEL4:R1.2 OUTPUTCHANNEL4:R9.1
OUTPUTCHANNEL4:N$6: OUTPUTCHANNEL4:IC2.13 OUTPUTCHANNEL4:R4.2 OUTPUTCHANNEL4:R8.1
OUTPUTCHANNEL4:N$8: OUTPUTCHANNEL4:IC2.14 OUTPUTCHANNEL4:R3.1 OUTPUTCHANNEL4:R8.2
OUTPUTCHANNEL4:N$9: OUTPUTCHANNEL4:IC2.7 OUTPUTCHANNEL4:R2.1 OUTPUTCHANNEL4:R9.2
OUTPUTCHANNEL4:N$11: OUTPUTCHANNEL4:IC2.1 OUTPUTCHANNEL4:R1.1 OUTPUTCHANNEL4:R11.2
OUTPUTCHANNEL4:N$12: OUTPUTCHANNEL4:IC2.8 OUTPUTCHANNEL4:R4.1 OUTPUTCHANNEL4:R7.2
OUTPUTCHANNEL4:N$13: OUTPUTCHANNEL4:IC2.2 OUTPUTCHANNEL4:R5.2 OUTPUTCHANNEL4:R11.1
OUTPUTCHANNEL4:N$14: OUTPUTCHANNEL4:IC2.9 OUTPUTCHANNEL4:R6.2 OUTPUTCHANNEL4:R7.1
OUTPUTCHANNEL4:N$15: OUTPUTCHANNEL4:IC1.2 OUTPUTCHANNEL4:R6.1
OUTPUTCHANNEL4:N$16: OUTPUTCHANNEL4:IC1.1 OUTPUTCHANNEL4:R5.1
OUTPUTCHANNEL4:N$17: OUTPUTCHANNEL4:IC3.6 OUTPUTCHANNEL4:R12.2 OUTPUTCHANNEL4:R22.1
OUTPUTCHANNEL4:N$18: OUTPUTCHANNEL4:IC3.13 OUTPUTCHANNEL4:R15.2 OUTPUTCHANNEL4:R20.1
OUTPUTCHANNEL4:N$20: OUTPUTCHANNEL4:IC3.14 OUTPUTCHANNEL4:R14.1 OUTPUTCHANNEL4:R20.2
OUTPUTCHANNEL4:N$21: OUTPUTCHANNEL4:IC3.7 OUTPUTCHANNEL4:R13.1 OUTPUTCHANNEL4:R22.2
OUTPUTCHANNEL4:N$23: OUTPUTCHANNEL4:D40.- OUTPUTCHANNEL4:R10.1
OUTPUTCHANNEL4:N$24: OUTPUTCHANNEL4:IC3.1 OUTPUTCHANNEL4:R12.1 OUTPUTCHANNEL4:R23.2
OUTPUTCHANNEL4:N$25: OUTPUTCHANNEL4:Q3.B OUTPUTCHANNEL4:R21.2
OUTPUTCHANNEL4:N$26: OUTPUTCHANNEL4:IC3.8 OUTPUTCHANNEL4:R15.1 OUTPUTCHANNEL4:R18.2
OUTPUTCHANNEL4:N$27: OUTPUTCHANNEL4:IC3.2 OUTPUTCHANNEL4:R16.2 OUTPUTCHANNEL4:R23.1
OUTPUTCHANNEL4:N$28: OUTPUTCHANNEL4:IC3.9 OUTPUTCHANNEL4:R17.2 OUTPUTCHANNEL4:R18.1
OUTPUTCHANNEL4:N$29: OUTPUTCHANNEL4:Q3.C OUTPUTCHANNEL4:R19.1 OUTPUTCHANNEL4:U$2.TIP@3
OUTPUTCHANNEL4:N$30: OUTPUTCHANNEL4:IC1.8 OUTPUTCHANNEL4:R17.1
OUTPUTCHANNEL4:N$31: OUTPUTCHANNEL4:IC1.7 OUTPUTCHANNEL4:R16.1
OUTPUTCHANNEL4:N$35: OUTPUTCHANNEL4:IC1.13
OUTPUTCHANNEL4:N$36: OUTPUTCHANNEL4:IC1.14
OUTPUTCHANNEL4:N$37: OUTPUTCHANNEL4:IC1.16
OUTPUTCHANNEL4:N$38: OUTPUTCHANNEL4:IC1.12
OUTPUTCHANNEL4:N$39: OUTPUTCHANNEL4:IC1.3
OUTPUTCHANNEL4:N$40: OUTPUTCHANNEL4:IC1.5
OUTPUTCHANNEL4:N$41: OUTPUTCHANNEL4:IC1.4
OUTPUTCHANNEL4:PITCH: OUTPUTCHANNEL4:R14.2 OUTPUTCHANNEL4:U$5.TIP@3
OUTPUTCHANNEL4:VELOCITY: OUTPUTCHANNEL4:R3.2 OUTPUTCHANNEL4:U$3.TIP@3
REF_-5V: C14.2 R26.2 U2.2
SWDCLK: SWD1.4 U$1.10
SWDIO: SWD1.2 U$1.13
VBUS: JP1.VBUS

## Tracks (layer width: path | path; a pad name or v marks a point on that pad's centre or on a via)
3.3V  (11 unrouted)
12V  (23 unrouted)
-12V  (18 unrouted)
BUTTON4  (1 unrouted)
EXTCV  (3 unrouted)
EXTGATE  (3 unrouted)
GND  (104 unrouted)
N$1  (1 unrouted)
N$2  (1 unrouted)
N$3  (1 unrouted)
N$4  (1 unrouted)
N$5  (1 unrouted)
N$6  (1 unrouted)
N$7  (1 unrouted)
N$11  (2 unrouted)
N$12  (2 unrouted)
N$13  (2 unrouted)
N$64  (2 unrouted)
OUTPUTCHANNEL1:MOD  (1 unrouted)
OUTPUTCHANNEL1:N$5  (2 unrouted)
OUTPUTCHANNEL1:N$6  (2 unrouted)
OUTPUTCHANNEL1:N$8  (2 unrouted)
OUTPUTCHANNEL1:N$9  (2 unrouted)
OUTPUTCHANNEL1:N$11  (2 unrouted)
OUTPUTCHANNEL1:N$12  (2 unrouted)
OUTPUTCHANNEL1:N$13  (2 unrouted)
OUTPUTCHANNEL1:N$14  (2 unrouted)
OUTPUTCHANNEL1:N$15  (1 unrouted)
OUTPUTCHANNEL1:N$16  (1 unrouted)
OUTPUTCHANNEL1:N$17  (2 unrouted)
OUTPUTCHANNEL1:N$18  (2 unrouted)
OUTPUTCHANNEL1:N$20  (2 unrouted)
OUTPUTCHANNEL1:N$21  (2 unrouted)
OUTPUTCHANNEL1:N$23  (1 unrouted)
OUTPUTCHANNEL1:N$24  (2 unrouted)
OUTPUTCHANNEL1:N$25  (1 unrouted)
OUTPUTCHANNEL1:N$26  (2 unrouted)
OUTPUTCHANNEL1:N$27  (2 unrouted)
OUTPUTCHANNEL1:N$28  (2 unrouted)
OUTPUTCHANNEL1:N$29  (2 unrouted)
OUTPUTCHANNEL1:N$30  (1 unrouted)
OUTPUTCHANNEL1:N$31  (1 unrouted)
OUTPUTCHANNEL1:PITCH  (1 unrouted)
OUTPUTCHANNEL1:VELOCITY  (1 unrouted)
OUTPUTCHANNEL2:CV_OUT  (1 unrouted)
OUTPUTCHANNEL2:MOD  (1 unrouted)
OUTPUTCHANNEL2:N$5  (2 unrouted)
OUTPUTCHANNEL2:N$6  (2 unrouted)
OUTPUTCHANNEL2:N$8  (2 unrouted)
OUTPUTCHANNEL2:N$9  (2 unrouted)
OUTPUTCHANNEL2:N$11  (2 unrouted)
OUTPUTCHANNEL2:N$12  (2 unrouted)
OUTPUTCHANNEL2:N$13  (2 unrouted)
OUTPUTCHANNEL2:N$14  (2 unrouted)
OUTPUTCHANNEL2:N$15  (1 unrouted)
OUTPUTCHANNEL2:N$16  (1 unrouted)
OUTPUTCHANNEL2:N$17  (2 unrouted)
OUTPUTCHANNEL2:N$18  (2 unrouted)
OUTPUTCHANNEL2:N$20  (2 unrouted)
OUTPUTCHANNEL2:N$21  (2 unrouted)
OUTPUTCHANNEL2:N$23  (1 unrouted)
OUTPUTCHANNEL2:N$24  (2 unrouted)
OUTPUTCHANNEL2:N$25  (1 unrouted)
OUTPUTCHANNEL2:N$26  (2 unrouted)
OUTPUTCHANNEL2:N$27  (2 unrouted)
OUTPUTCHANNEL2:N$28  (2 unrouted)
OUTPUTCHANNEL2:N$29  (2 unrouted)
OUTPUTCHANNEL2:N$30  (1 unrouted)
OUTPUTCHANNEL2:N$31  (1 unrouted)
OUTPUTCHANNEL2:PITCH  (1 unrouted)
OUTPUTCHANNEL2:VELOCITY  (1 unrouted)
OUTPUTCHANNEL3:CV_OUT  (1 unrouted)
OUTPUTCHANNEL3:MOD  (1 unrouted)
OUTPUTCHANNEL3:N$5  (2 unrouted)
OUTPUTCHANNEL3:N$6  (2 unrouted)
OUTPUTCHANNEL3:N$8  (2 unrouted)
OUTPUTCHANNEL3:N$9  (2 unrouted)
OUTPUTCHANNEL3:N$11  (2 unrouted)
OUTPUTCHANNEL3:N$12  (2 unrouted)
OUTPUTCHANNEL3:N$13  (2 unrouted)
OUTPUTCHANNEL3:N$14  (2 unrouted)
OUTPUTCHANNEL3:N$15  (1 unrouted)
OUTPUTCHANNEL3:N$16  (1 unrouted)
OUTPUTCHANNEL3:N$17  (2 unrouted)
OUTPUTCHANNEL3:N$18  (2 unrouted)
OUTPUTCHANNEL3:N$20  (2 unrouted)
OUTPUTCHANNEL3:N$21  (2 unrouted)
OUTPUTCHANNEL3:N$23  (1 unrouted)
OUTPUTCHANNEL3:N$24  (2 unrouted)
OUTPUTCHANNEL3:N$25  (1 unrouted)
OUTPUTCHANNEL3:N$26  (2 unrouted)
OUTPUTCHANNEL3:N$27  (2 unrouted)
OUTPUTCHANNEL3:N$28  (2 unrouted)
OUTPUTCHANNEL3:N$29  (2 unrouted)
OUTPUTCHANNEL3:N$30  (1 unrouted)
OUTPUTCHANNEL3:N$31  (1 unrouted)
OUTPUTCHANNEL3:PITCH  (1 unrouted)
OUTPUTCHANNEL3:VELOCITY  (1 unrouted)
OUTPUTCHANNEL4:CV_OUT  (1 unrouted)
OUTPUTCHANNEL4:MOD  (1 unrouted)
OUTPUTCHANNEL4:N$5  (2 unrouted)
OUTPUTCHANNEL4:N$6  (2 unrouted)
OUTPUTCHANNEL4:N$8  (2 unrouted)
OUTPUTCHANNEL4:N$9  (2 unrouted)
OUTPUTCHANNEL4:N$11  (2 unrouted)
OUTPUTCHANNEL4:N$12  (2 unrouted)
OUTPUTCHANNEL4:N$13  (2 unrouted)
OUTPUTCHANNEL4:N$14  (2 unrouted)
OUTPUTCHANNEL4:N$15  (1 unrouted)
OUTPUTCHANNEL4:N$16  (1 unrouted)
OUTPUTCHANNEL4:N$17  (2 unrouted)
OUTPUTCHANNEL4:N$18  (2 unrouted)
OUTPUTCHANNEL4:N$20  (2 unrouted)
OUTPUTCHANNEL4:N$21  (2 unrouted)
OUTPUTCHANNEL4:N$23  (1 unrouted)
OUTPUTCHANNEL4:N$24  (2 unrouted)
OUTPUTCHANNEL4:N$25  (1 unrouted)
OUTPUTCHANNEL4:N$26  (2 unrouted)
OUTPUTCHANNEL4:N$27  (2 unrouted)
OUTPUTCHANNEL4:N$28  (2 unrouted)
OUTPUTCHANNEL4:N$29  (2 unrouted)
OUTPUTCHANNEL4:N$30  (1 unrouted)
OUTPUTCHANNEL4:N$31  (1 unrouted)
OUTPUTCHANNEL4:PITCH  (1 unrouted)
OUTPUTCHANNEL4:VELOCITY  (1 unrouted)
REF_-5V  (2 unrouted)
SWDCLK  (1 unrouted)
SWDIO  (1 unrouted)